# Altium PCB Light Control Compact.PcbDoc
Units mm, origin at the board's own origin, x right, y up, seen from the top; angles counter-clockwise.
Board outline 152.4 x 101.6 mm, 2 copper layers (Top Layer, Bottom Layer); 20 components, 32 nets, 93 pads, 2 vias.
Unrouted connection lines stored in the file: 54.
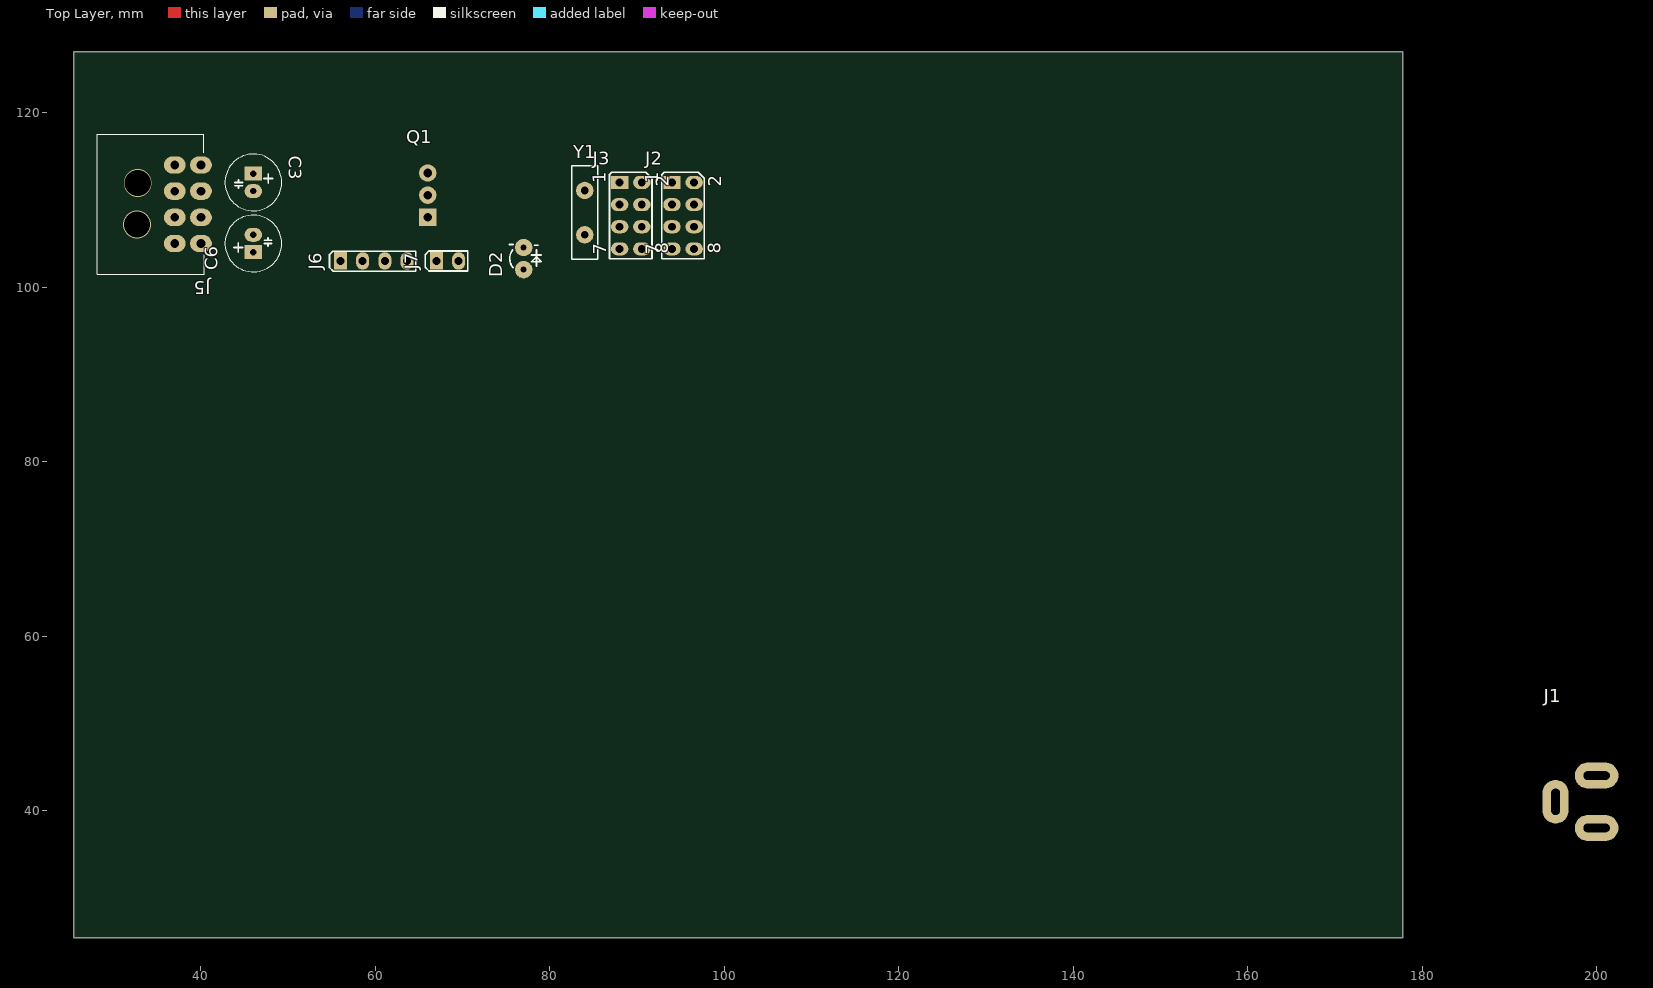
[diagram p0: Top Layer view]
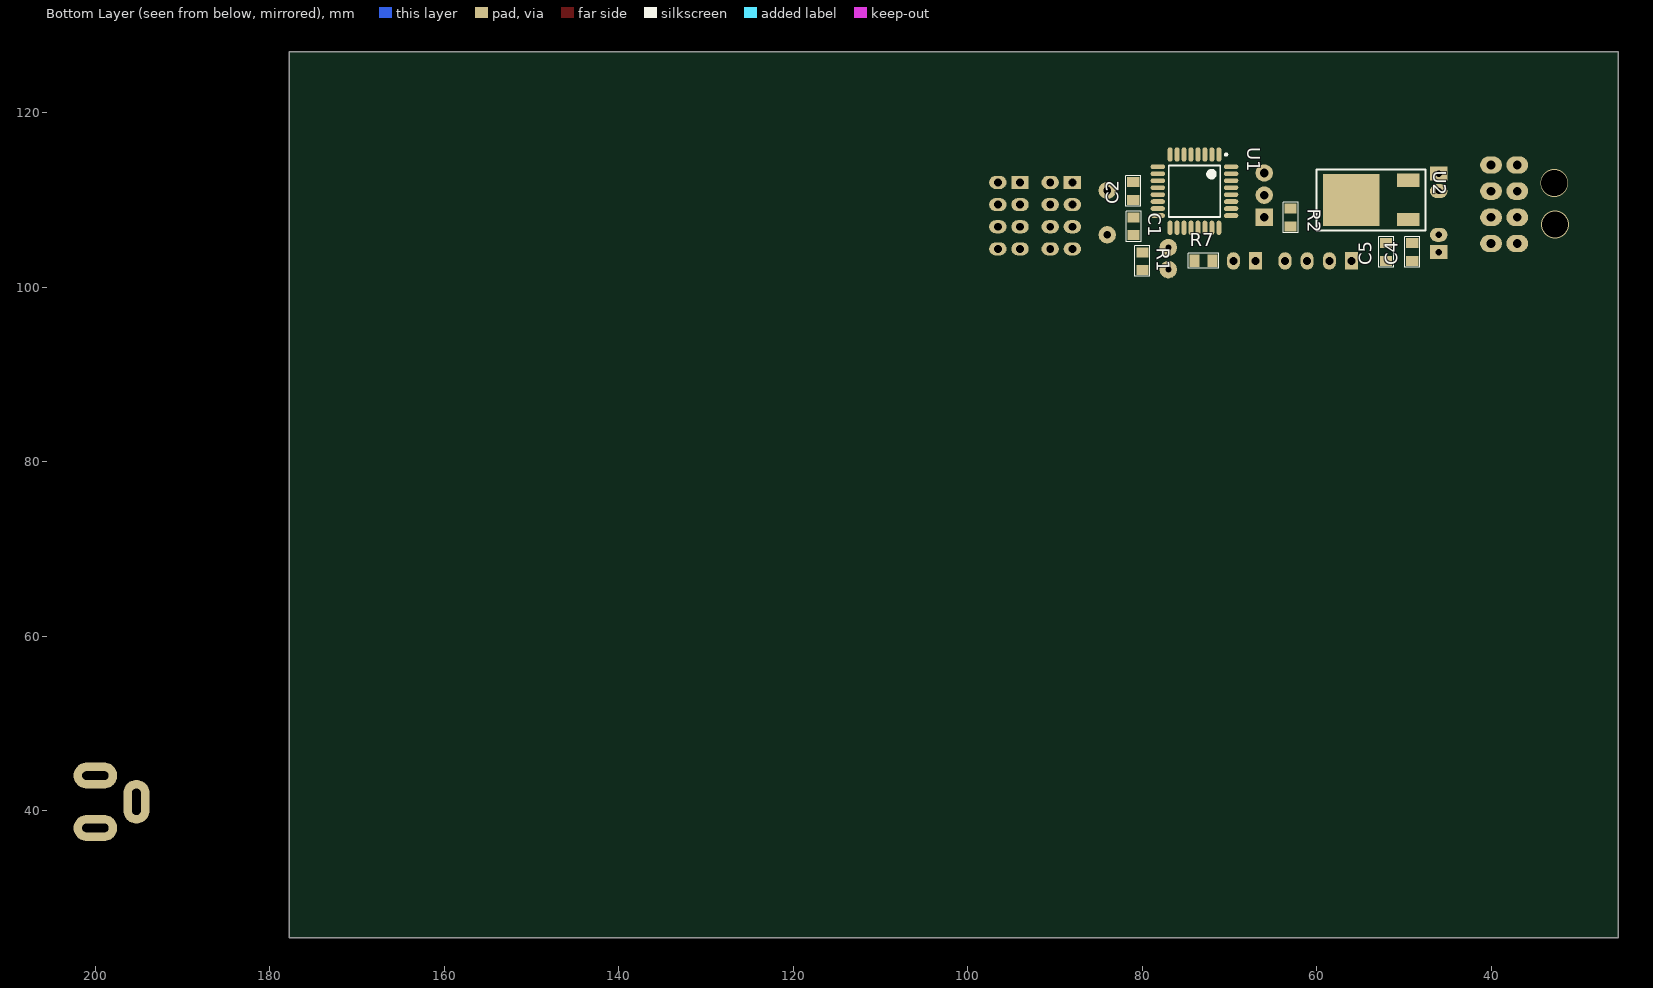
[diagram p1: Bottom Layer view, seen from below]

## Layer stack, top to bottom
Top Solder: solder mask 0.0102, Solder Resist, Dk 3.5
Top Layer: signal copper 0.0356
Dielectric 1: dielectric 0.32, FR-4, Dk 4.8
Bottom Layer: signal copper 0.0356
Bottom Solder: solder mask 0.0102, Solder Resist, Dk 3.5

## Board outline
25.4,25.4 177.8,25.4 177.8,127 25.4,127

## Design rules (kind name [scope] priority, off if disabled: settings)
Clearance [All] p1: gap=0.254
PolygonConnect [All] p1: connectstyle=Relief reliefconductorwidth=0.254 reliefentries=4 polygonreliefangle="90 Angle" airgapwidth=0.254
RoutingVias [All] p1: holewidth=0.711 width=1.27 viastyle="Through Hole" minholewidth=0.711 minwidth=1.27 maxholewidth=0.711 maxwidth=1.27
SolderMaskExpansion [All] p1: expansion=0.102
Width [All] p1: maxlimit=0.254 minlimit=0.254 preferedwidth=0.254
29 further rules are at their usual default settings.

## Components (designator, comment, footprint, x,y, rotation, side; value= is the part's Value field where it differs from the comment)
C1 "22pF" "SMD 0805 (2012)" 81,108 r270 bottom
C2 "22pF" "SMD 0805 (2012)" 81,110 r90 bottom
C3 "220mF 16v" "Cap E p2mm D6.5xH11" 46,113 r270 top
C4 "0.01uF" "SMD 0805 (2012)" 49,103 r90 bottom
C5 "0.1uF" "SMD 0805 (2012)" 52,103 r90 bottom
C6 "25v 220mF" "Cap E p2mm D6.5xH11" 46,104 r90 top
D2 "FYL-3014GD" "LED Round 3mm Green" 77,102 r90 top
J1 "DC In 12V" "DC Connector" 200,38 r90 top
J2 "PLD-8 (2 x 4)" "Line 2.54 X 8D (2 x 4)" 94,112 r0 top
J3 "ICSP6+SS" "Line 2.54 X 8D (2 x 4)" 88,112 r0 top
J5 "IN Connector" "Molex Micro-Fit 3.0 - 8 pin D R" 37,105 r270 top
J6 "I2C" "Line 2.54 X 4" 56,103 r90 top
J7 "ON/OFF Display and serial" "Line 2.54 x 2" 67,103 r90 top
Q1 "TIP122" TO220-2 66,108 r0 top
R1 "4.7k Om" "SMD 0805 (2012)" 80,104 r270 bottom
R2 "1kOm" "SMD 0805 (2012)" 63,109 r270 bottom
R7 "10kOm" "SMD 0805 (2012)" 74,103 r180 bottom
U1 "ATmega328P-AU" 32A_N 74,111 r270 bottom
U2 "7805C" D-PAK 56,110 r180 bottom
Y1 "16 MHz" "XTAL - 2" 84,106 r90 top

## Footprints (in the part's own frame and the unit in brackets; to place one, negate y for a bottom-side part, rotate by r counter-clockwise, add the part's x,y. Pads: shape width x height; smd on the part's side, far side on the other; paste and mask are expansions set on the pad)
32A_N [mm] "Thin QFP, 32-Leads, Body 7x7mm, Pitch 0.8mm, IPC Medium Density"
  oval 1.65x0.55 smd: 1(-4.2,2.8) 2(-4.2,2) 3(-4.2,1.2) 4(-4.2,0.4) 5(-4.2,-0.4) 6(-4.2,-1.2) 7(-4.2,-2) 8(-4.2,-2.8) 17(4.2,-2.8) 18(4.2,-2) 19(4.2,-1.2) 20(4.2,-0.4) 21(4.2,0.4) 22(4.2,1.2) 23(4.2,2) 24(4.2,2.8)
  oval 0.55x1.65 smd: 9(-2.8,-4.2) 10(-2,-4.2) 11(-1.2,-4.2) 12(-0.4,-4.2) 13(0.4,-4.2) 14(1.2,-4.2) 15(2,-4.2) 16(2.8,-4.2) 25(2.8,4.2) 26(2,4.2) 27(1.2,4.2) 28(0.4,4.2) 29(-0.4,4.2) 30(-1.2,4.2) 31(-2,4.2) 32(-2.8,4.2)
  silkscreen extent -4.32,-2.95 2.95,3.75, body extent -3.5,-3.5 3.5,3.5, height 1.2
"Cap E p2mm D6.5xH11" [mm] "D 6.5mm; H 11mm"
  rect 1.6x2 hole 0.7: 1(0,0)
  oval 1.6x2 hole 0.7: 2(2,0)
  silkscreen extent -2.25,-3.25 4.25,3.25, body extent -2.22,-3.22 4.27,3.28, height 11.49
D-PAK [mm]
  rect 2.54x1.5 smd: 1(6.5,-2.25) 3(6.5,2.25)
  rect 6.48x5.97 smd: 2(0,0)
  silkscreen extent -4,-3.5 8.5,3.5, body extent -2.7,-3.29 7,3.29, height 2.3
"DC Connector" [mm] "Ext Pin D: 5.5mm; Int Pin D: 2.5mm"
  oval 5x3 hole 1 slot 3 at 0 deg: GND(3,4.7)
  oval 3x5 hole 1 slot 3 at 90 deg: GND(6,0) VCC(0,0)
  body extent -0.2,-4.53 13.63,4.98, height 11
"LED Round 3mm Green" [mm]
  round 2 hole 0.7: A(0,0) K(2.54,0)
  silkscreen extent 0.25,-2.03 2.88,1.63, body extent -0.39,-1.65 2.91,1.64, height 5.51
"Line 2.54 x 2" [mm]
  rect 2x1.5 hole 0.9: 1(0,0)
  oval 2x1.5 hole 0.9: 2(0,-2.54)
  silkscreen extent -1.15,-3.57 1.15,1.28, body extent -1.25,-3.69 1.25,1.39, height 8.3
"Line 2.54 X 4" [mm]
  rect 2x1.5 hole 0.9: 1(0,0)
  oval 2x1.5 hole 0.9: 2(0,-2.54) 3(0,-5.08) 4(0,-7.62)
  silkscreen extent -1.17,-8.62 1.12,1.27, body extent -1.25,-8.78 1.25,1.38, height 8.2
"Line 2.54 X 8D (2 x 4)" [mm]
  rect 2x1.5 hole 0.9: 1(0,0)
  oval 2x1.5 hole 0.9: 2(2.54,0) 3(0,-2.54) 4(2.54,-2.54) 5(0,-5.08) 6(2.54,-5.08) 7(0,-7.62) 8(2.54,-7.62)
  silkscreen extent -1.17,-8.75 3.7,1.17, body extent -1.27,-8.88 3.81,1.28, height 8.6
"Molex Micro-Fit 3.0 - 8 pin D R" [mm]
  oval 2x2.5 hole 1: 1(0,0) 2(-3,0) 3(-6,0) 4(-9,0) 5(0,3) 6(-3,3) 7(-6,3) 8(-9,3)
  silkscreen extent -12.52,-8.87 3.52,3.4, body extent -12.57,-8.87 3.58,3.37, height 8.73
"SMD 0805 (2012)" [mil]
  rect 45x55 smd: 1(0.35,0.98) 2(80.35,0.98)
  silkscreen extent -29,-32 109,34, body extent 1,-24 80,26, height 31
TO220-2 [mm]
  rect 2x2 hole 1: 1(0,0)
  round 2 hole 1: 2(0,2.54) 3(0,5.08)
  body extent -2.7,-2.65 1.8,7.75, height 19
"XTAL - 2" [mm]
  round 2 hole 0.9: 1(0,0) 2(5.08,0)
  silkscreen extent -2.8,-1.5 7.9,1.5, body extent -2.79,-1.52 7.87,1.52, height 3.09

## Part data
C1 C2 C4 C5: library part "Cap SMD 0402-1812", "Capacitor"
C3 C6: library part "Cap E 220mF x 16V", "Capacitor"
D2: library part "Led Round 3mm Green", "2.1v 10mA, 15-30mCd"
J1: library part "DC Connector (PJ-002B)", "DC Connector"
J2: "Vert, Sgl line, Male"
J3: library part "PLD-8 (2 x 4)", "Vert, Sgl line, Male"
J5: library part "Micro-Fit 8R (2x4)", "Horisontal, Dbl line, Male - 3mm"
J6: library part PLS-4, "Vert, Sgl line, Male"
J7: library part PLS-2, "Vert, Sgl line, Male"
Q1: "NPN Darlington 5A, 65W, 100V, h>1000"
R1 R2 R7: library part "Res All Types"
U1: "8-bit AVR Microcontroller, 32KB Flash, 1KB EEPROM, 2KB SRAM, 32-pin TQFP, Industrial Grade (-40°C to 85°C)"
U2: "Voltage Regulator"
Y1: library part XTAL, "Crystal Oscillator"

## Via types
v1: diameter 3.2, hole 3, Top Layer to Bottom Layer, 2 vias

## Nets (pads, with @x,y where several pads share a name; then routed paths per layer and width w, separated by ;. In a path a pad name is that pad's centre, name@x,y a point inside that pad or via, vN(x,y) a via of type N, cw(c..) or ccw(c..) an arc to the next point about the centre after c; other vN are vias at no path point)
+5V: C3.1 J3.2 J6.2 R1.1 R7.2 U1.4 U1.6 U1.18 U2.3
+12V: C4.2 C5.2 C6.1 J1.VCC J5.2 U2.1
ADC6: U1.19
ADC7: U1.22
AREF: U1.20
GND: C1.1 C2.1 C3.2 C4.1 C5.1 C6.2 D2.K J1.GND J2.2 J3.6 J5.1 J6.1 J7.2 Q1.3 U1.3 U1.5 U1.21 U2.2
INT0: J5.4 U1.32
INT1: J5.3 U1.1
"LED STRIP 1": J2.1 Q1.2
MISO: J3.1 U1.16
MOSI: J3.4 U1.15
NetD2_A: D2.A R1.2
NetQ1_1: Q1.1 R2.2
PB0: U1.12
PB1: J7.1 R2.1 R7.1 U1.13
PB6: C2.2 U1.7 Y1.2
PB7: C1.2 U1.8 Y1.1
PC0: U1.23
PC1: U1.24
PC2: U1.25
PC3: U1.26
PD4: U1.2
PD5: U1.9
PD6: U1.10
PD7: U1.11
RESET: J3.5 U1.29
RX: J5.6 U1.30
SCK: J3.3 U1.17
SCL: J5.8 J6.4 U1.28
SDA: J5.7 J6.3 U1.27
SS: J3.7 U1.14
TX: J5.5 U1.31
pads on no net: J2.3 J2.4 J2.5 J2.6 J2.7 J2.8 J3.8
copper on no net:
  other v1: 32.68,107.16 32.75,111.95

## Text inside footprints (layer, text, board x,y; h text height)
J2: Top Overlay "7" at 92.475,103.725 h1.52 r90; Top Overlay "2" at 99.65,111.5 h1.52 r90; Top Overlay "8" at 99.6,103.8 h1.52 r90; Top Overlay "1" at 92.425,111.925 h1.52 r90
J3: Top Overlay "7" at 86.475,103.725 h1.52 r90; Top Overlay "2" at 93.65,111.5 h1.52 r90; Top Overlay "8" at 93.6,103.8 h1.52 r90; Top Overlay "1" at 86.425,111.925 h1.52 r90